# Altium PCB 20K Control Board V1.1.PcbDoc (part 8 of 24)
Units mm, origin at the board's own origin, x right, y up, seen from the top; angles counter-clockwise.
Board outline 132 x 260 mm, 4 copper layers (Top Layer, GND, VCC, Bottom Layer); 1384 components, 779 nets, 4515 pads, 1774 vias.
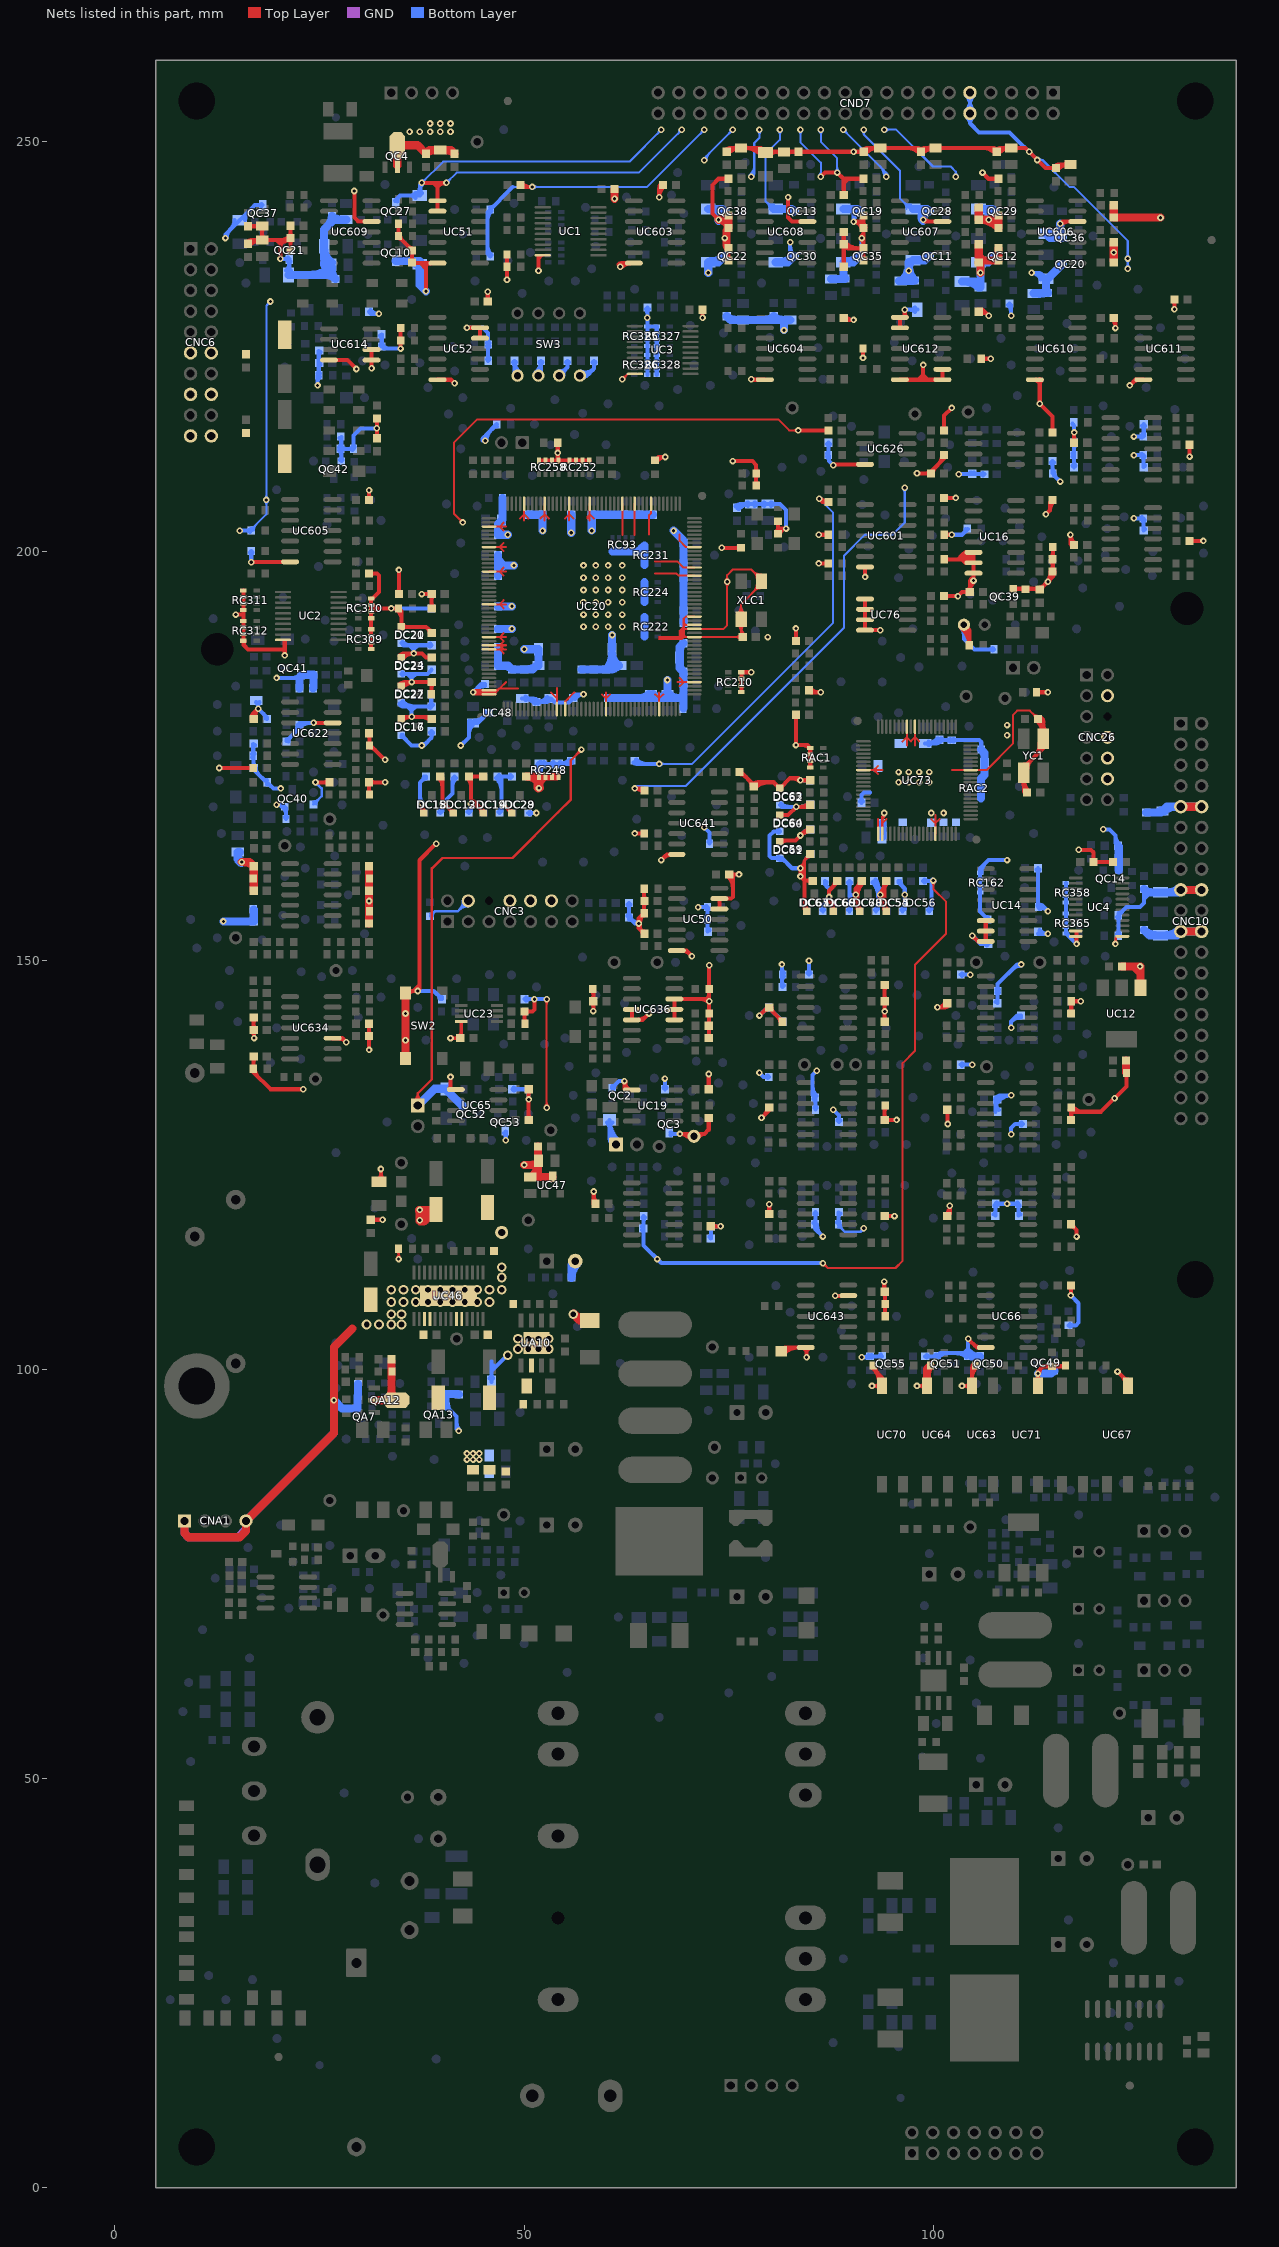
[diagram p10: the nets of this part, all layers, seen from the top]

## Via types
v1: diameter 0.8, hole 0.4, Top Layer to Bottom Layer, tented both sides, 1354 vias
v2: diameter 1.2, hole 0.7, Top Layer to Bottom Layer, 261 vias
v3: diameter 0.8, hole 0.4, Top Layer to Bottom Layer, 58 vias
v4: diameter 1.2, hole 0.7, Top Layer to Bottom Layer, tented top, 58 vias
v5: diameter 0.8, hole 0.4, Top Layer to Bottom Layer, tented top, 22 vias
v6: diameter 1.2, hole 0.7, Top Layer to Bottom Layer, tented both sides, 13 vias
v7: diameter 1.2, hole 0.7, Top Layer to Bottom Layer, tented bottom, 8 vias

## Nets (pads, with @x,y where several pads share a name; then routed paths per layer and width w, separated by ;. In a path a pad name is that pad's centre, name@x,y a point inside that pad or via, vN(x,y) a via of type N, cw(c..) or ccw(c..) an arc to the next point about the centre after c; other vN are vias at no path point) (continued)
GND: (continued)
  Top Layer w0.5: v1(12.75,173.5) RC444.1@16.9,173.5 ; v1(14.75,192.25) 15.7,192.25 ; 15.7,188.688 cw(c16.212,188.688) 15.85,189.05 ccw(c16.334,188.734) 15.925,188.325 ; RC311.5@15.7,195.2 RC311.6@15.7,194.4 RC311.7@15.7,193.6 RC311.8@15.7,192.8 15.7,192.25 ; CC225.2@16.073,237.727 cw(c16.733,237.067) CC225.2@16.733,238 ; CC225.2@16.25,237.55 16.7,238 CC334.2@18,238 21.45,238 ccw(c21.45,236.234) 20.201,237.483 ; CC247.2@16.25,239.7 17.95,239.7 CC334.2@17.95,238.05 ; CC225.2@16.427,237.373 cw(c17.94,235.86) CC334.2@17.94,238 ; CC247.2@16.427,239.523 cw(c16.854,239.096) 16.854,239.7 cw(c16.854,240.304) CC247.2@16.427,239.877 ; v1@16.69,198.69 UC605.7@21.4,198.69 ; CC278.2@16.709,179.432 cw(c17.412,179.63) 16.896,180.146 ; v1@16.756,198.544 cw(c17.109,198.191) 17.109,198.69 ; RC188.1@16.759,136.941 ccw(c16.296,137.404) 16.95,137.404 ; RC444.1@16.759,173.359 ccw(c16.417,173.017) 16.417,173.5 ccw(c16.417,173.983) RC444.1@16.759,173.641 ; CC98.1@16.773,138.073 cw(c16.346,137.646) 16.95,137.646 cw(c17.554,137.646) CC98.1@17.127,138.073 ; CC18.2@16.773,141.323 cw(c16.226,140.776) v1@17,140.776 ; CC18.2@16.773,141.677 ccw(c16.346,142.104) 16.95,142.104 ccw(c17.554,142.104) CC18.2@17.127,141.677 ; CC447.2@16.773,142.823 cw(c16.346,142.396) 16.95,142.396 cw(c17.554,142.396) CC447.2@17.127,142.823 ; CC278.2@16.773,179.677 ccw(c16.346,180.104) 16.95,180.104 ccw(c17.554,180.104) CC278.2@17.127,179.677 ; CC98.1@16.95,138.25 16.95,136.3 19,134.25 v1(23,134.25) ; CC18.2@16.95,141.5 CC447.2@16.95,143 ; CC278.2@16.95,179.5 16.95,180.2 v1(17.5,180.75) ccw(c18.355,179.895) CC278.2@17.191,179.568 ; 16.955,239.7 ccw(c16.955,240.595) CC342.2@17.588,239.962 ; v1(17,140.5) CC18.2@17,141.7 ; RC188.1@17.1,136.7 ccw(c18.428,136.7) 17.489,135.761 ; 17.196,239.7 cw(c17.196,239.146) CC342.2@17.588,239.538 ; CC334.2@17.588,237.788 ccw(c17.076,237.276) 17.076,238 ccw(c17.076,238.724) CC334.2@17.588,238.212 ; CC334.2@17.788,238.212 ccw(c17.396,238.604) 17.95,238.604 ; CC342.2@17.788,239.538 cw(c17.396,239.146) 17.95,239.146 ; 17.95,238.845 ccw(c18.845,238.845) CC334.2@18.212,238.212 ; 17.95,238.905 cw(c18.845,238.905) CC342.2@18.212,239.538 ; CC334.2@18.412,237.788 cw(c18.924,237.276) 18.924,238 cw(c18.924,238.724) CC334.2@18.412,238.212 ; 19.718,238 20.218,237.5 ; v1(20.218,235.718) 20.218,237.5 ; 20.218,237.968 20.218,237.5 ; 20.243,238 ccw(c20.243,239.457) 21.273,238.427 ccw(c20.846,238.854) 21.45,238.854 ccw(c22.054,238.854) CC350.2@21.627,238.427 ; 20.478,237.759 cw(c21.15,237.087) CC350.2@21.388,238.008 ; 20.718,238 20.218,237.5 ; v1(20.75,187.25) 20.75,189 ; 20.75,187.75 20.5,188 ; 20.75,188.25 20.5,188 ; CC355.2@21.273,236.927 ccw(c20.846,237.354) 21.45,237.354 ccw(c22.054,237.354) CC355.2@21.627,236.927 ; CC350.2@21.273,238.073 cw(c20.846,237.646) 21.45,237.646 cw(c22.054,237.646) CC350.2@21.627,238.073 ; CC317.2@21.273,239.573 cw(c20.846,239.146) 21.45,239.146 cw(c22.054,239.146) CC317.2@21.627,239.573 ; CC355.2@21.45,236.75 CC350.2@21.45,238.25 CC317.2@21.45,239.75 ; v1(24.27,179.02) UC622.12@26.6,179.02 ; v1(24.5,171.75) CC346.1@26.2,171.75 ; CC346.1@26.023,171.573 ccw(c25.596,171.146) 25.596,171.75 ccw(c25.596,172.354) CC346.1@26.023,171.927 ; UC614.4@26.15,223.345 28.405,223.345 v1(29.5,222.25) ; UC634.10@26.6,140.48 27.77,140.48 v1(28.25,140) ; UC634.10@27.4,140.43 cw(c27.4,139.416) v1@28.117,140.133 ; UC634.10@27.414,140.432 cw(c27.57,139.91) 27.955,140.295 ; v1(29.25,244) 29.25,240.75 29.73,240.27 UC609.12@31.35,240.27 ; CC90.1@30.873,140.573 cw(c30.446,140.146) 31.05,140.146 cw(c31.654,140.146) CC90.1@31.227,140.573 ; CC90.1@30.873,140.927 ccw(c30.446,141.354) 31.05,141.354 ccw(c31.654,141.354) CC90.1@31.227,140.927 ; CC449.2@30.873,142.073 cw(c30.446,141.646) 31.05,141.646 cw(c31.654,141.646) CC449.2@31.227,142.073 ; CC283.1@30.873,171.573 cw(c30.446,171.146) 31.05,171.146 cw(c31.654,171.146) 31.227,171.573 cw(c31.654,171.146) 31.654,171.75 cw(c31.654,172.354) CC283.1@31.227,171.927 ; CC282.1@30.873,177.573 cw(c30.326,177.026) 31.1,177.026 ; CC180.2@30.873,206.427 ccw(c30.446,206.854) 31.05,206.854 ccw(c31.654,206.854) CC180.2@31.227,206.427 ; RC485.1@30.959,176.441 ccw(c30.617,176.783) 31.1,176.783 ccw(c31.583,176.783) RC485.1@31.241,176.441 ; v1(31.05,139.05) CC449.2@31.05,142 ; RC489.1@31.05,170.3 CC283.1@31.05,171.75 ; 31.05,170.904 ccw(c31.704,170.904) RC489.1@31.241,170.441 ; CC181.2@31.05,197.25 32,197.25 32.25,197 32.25,195 RC310.8@31.45,194.2 ; CC180.2@31.05,206.25 v1(31.05,207.45) ; CC283.1@31.1,171.75 v1(33,171.75) ; RC485.1@31.1,176 cw(c31.1,175.034) 31.783,175.717 ; CC282.1@31.1,177.7 RC485.1@31.1,176.25 31.25,176.25 v1(33,174.5) ; CC181.2@31.227,197.073 cw(c31.654,196.646) 31.654,197.25 cw(c31.654,197.854) CC181.2@31.227,197.427 ; CC291.2@31.25,118.3 v1(32.7,118.3) ; 31.3,188.3 RC310.8@31.3,194.2 ; RC310.6@31.3,192.6 31.7,193 v1(33.75,193) RC225.1@34.65,193 35,192.65 DC20.1@35,191 ; v1(31.35,222.35) UC614.6@31.35,224.615 ; CC291.2@31.427,118.123 cw(c31.854,117.696) 31.854,118.3 cw(c31.854,118.904) CC291.2@31.427,118.477 ; 31.556,192.856 ccw(c31.812,192.6) 31.45,192.6 cw(c32.416,191.634) 32.416,193 cw(c32.416,194.366) 31.45,193.4 cw(c31.13,192.928) 31.7,192.928 ; CC287.2@31.823,213.977 ccw(c31.396,214.404) 32,214.404 ccw(c32.604,214.404) CC287.2@32.177,213.977 ; CC288.2@31.823,216.023 cw(c31.396,215.596) 32,215.596 cw(c32.604,215.596) CC288.2@32.177,216.023 ; CC287.2@32,213.8 CC288.2@32,216.2 ; RC501.1@32.217,123.233 ccw(c31.534,123.916) 32.5,123.916 ccw(c33.466,123.916) RC501.1@32.783,123.233 ; RC501.1@32.5,122.95 v1(32.5,124.5) ; RC225.1@34.509,192.809 cw(c33.322,191.622) 35,191.622 ; RC225.1@34.509,192.859 ccw(c34.167,192.517) 34.167,193 ccw(c34.167,193.483) RC225.1@34.509,193.141 ; RC526.1@34.509,238.691 ccw(c34.167,239.033) 34.65,239.033 ccw(c35.133,239.033) RC526.1@34.791,238.691 ; RC27.2@34.509,239.809 cw(c34.167,239.467) 34.65,239.467 cw(c35.133,239.467) RC27.2@34.791,239.809 ; CC140.1@34.523,194.927 ccw(c34.096,195.354) 34.7,195.354 ccw(c35.304,195.354) CC140.1@34.877,194.927 ; RC526.1@34.65,238.5 34.65,238.436 36.3,236.786 CC219.2@36.3,236.75 CC243.2@36.3,235.25 ; RC27.2@34.65,239.75 34.65,238.25 cw(c34.65,237.8) RC526.1@34.968,238.118 ; CC140.1@34.7,194.75 v1(34.7,197.7) ; RC530.1@34.759,225.559 cw(c34.417,225.217) 34.9,225.217 cw(c35.383,225.217) RC530.1@35.041,225.559 ; RC530.1@34.759,225.941 ccw(c34.417,226.283) 34.9,226.283 ccw(c35.383,226.283) RC530.1@35.041,225.941 ; RC529.1@34.759,227.059 cw(c34.417,226.717) 34.9,226.717 cw(c35.383,226.717) RC529.1@35.041,227.059 ; DC24.1@34.774,187.186 cw(c35.439,186.638) 35.439,187.5 ; DC27.1@34.793,183.707 cw(c35.5,183) 35.5,184 ; RC526.1@34.85,238.45 ccw(c35.366,238.45) RC526.1@35.001,238.085 ; DC20.1@34.853,190.897 ccw(c34.5,191.25) 35,191.25 ccw(c35.5,191.25) 35.147,190.897 ccw(c35.5,191.25) 35.5,190.75 ccw(c35.5,190.25) DC20.1@35.147,190.603 ; v1(34.9,224.75) RC530.1@34.9,225.75 RC529.1@34.9,227.25 ; DC17.1@35,179.5 35.25,179.75 CC143.1@38.45,179.75 ; DC27.1@35,183.5 35.5,184 CC154.1@38.7,184 38.7,182.55 RC234.1@38.65,182.5 ; DC27.1@35,183.707 ccw(c35,184.207) 35.354,183.854 ccw(c35.707,183.5) DC27.1@35.207,183.5 ; DC24.1@35,187 35.5,187.5 v1(36.5,187.5) ; DC24.1@35,187.207 ccw(c35,187.707) 35.354,187.354 ccw(c35.707,187) DC24.1@35.207,187 ; DC20.1@35,190.75 38,190.75 CC152.1@38.7,190.05 ; DC17.1@35.147,179.353 cw(c36.104,178.396) v1@36.104,179.75 ; DC27.1@35.147,183.353 cw(c36.707,181.793) 36.707,184 ; DC24.1@35.16,186.868 cw(c36.5,185.763) v1(36.5,187.5) ; SW2.2@35.75,146.25 36.5,146.25 ; SW2.2@35.783,146.433 ccw(c36.224,146.874) 36.224,146.25 ; SW2.2@35.82,145.91 cw(c36.5,145.4) 36.5,146.25 ; CC219.2@35.847,237.239 cw(c35.359,236.75) CC219.2@36.05,236.75 ; CC219.2@35.935,237.151 ccw(c36.3,237.516) CC219.2@36.3,237 ; CC243.2@36.123,235.427 ccw(c35.696,235.854) 36.3,235.854 ccw(c36.904,235.854) 36.477,235.427 ccw(c37.048,235.998) 37.048,235.19 ; CC219.2@36.123,236.573 cw(c35.696,236.146) 36.3,236.146 cw(c36.904,236.146) CC219.2@36.477,236.573 ; CC243.2@36.36,235.19 UC51.7@39.4,235.19 UC51.7@38.5,235.19 ; v1@36.894,146.356 ccw(c36.095,147.155) 37.225,147.155 ; v1@37.132,146.322 cw(c37.614,146.586) 37.225,146.975 36.5,146.25 ; 37.31,235.19 38,234.5 ; 37.493,179.75 cw(c37.493,178.293) CC143.1@38.523,179.323 ; v1@37.5,169.104 ccw(c38.854,169.104) DC15.1@37.897,168.147 ; v1(37.5,169.155) 37.5,168.25 DC15.1@37.75,168 ; v1(37.5,194.75) CC137.1@38.7,194.75 CC139.1@38.7,193 ; v1(37.5,245) v1(40.5,245) ; 37.75,235.19 38,234.94 ; v1(38,231.75) 38,234.5 ; 38.075,235.015 cw(c38.436,234.654) UC51.7@38.585,235.142 ; 38.238,190.512 cw(c37.726,190) CC152.1@38.45,190 ; 38.25,235.19 38,234.94 ; CC152.1@38.359,190.391 ccw(c38.7,190.733) CC152.1@38.7,190.25 ; RC234.1@38.509,182.691 ccw(c38.046,183.154) 38.7,183.154 ; CC154.1@38.523,184.177 cw(c38.096,184.604) 38.096,184 cw(c38.096,183.396) 38.523,183.823 cw(c38.096,183.396) 38.7,183.396 cw(c39.304,183.396) CC154.1@38.877,183.823 ; CC155.1@38.523,186.823 ccw(c38.096,186.396) 38.096,187 ccw(c38.096,187.604) CC155.1@38.523,187.177 ; CC139.1@38.523,193.177 ccw(c38.096,193.604) 38.7,193.604 ccw(c39.304,193.604) CC139.1@38.877,193.177 ; CC137.1@38.523,194.927 cw(c38.096,195.354) 38.096,194.75 cw(c38.096,194.146) 38.523,194.573 cw(c38.096,194.146) 38.7,194.146 cw(c39.304,194.146) CC137.1@38.877,194.573 ; CC155.1@38.7,187 38,187 37.5,187.5 v1(36.5,187.5) ; 38.9,245 39.4,244.5 ; v1(39.25,164.25) 37.225,162.225 37.225,146.475 v1(37,146.25) 36.5,146.25 ; UC52.7@39.4,220.94 41.06,220.94 v1(41.5,220.5) ; UC51.2@39.4,241.54 39.4,244.5 ; 39.4,244.9 39.4,244.5 ; CC148.1@39.573,172.273 cw(c38.543,171.243) 40,171.243 ; 39.601,244.7 cw(c40.14,244.161) v1@40.441,244.862 ; CC148.1@39.75,172.45 40,172.2 v1(40,169.155) 40.19,169.155 DC12.1@41.345,168 ; 39.9,245 39.4,244.5 ; v1@40,169.005 cw(c40,168.184) 40.58,168.765 ; UC65.1@40.815,134.24 ccw(c40.367,134.688) 41,134.688 ; UC65.1@41,134.25 v1@41,135.645 ; DC12.1@41.138,168 ccw(c40.638,168) 40.991,168.354 ccw(c41.345,168.707) DC12.1@41.345,168.207 ; v1(43,227.29) UC52.13@44.6,227.29 UC52.12@44.6,226.02 ; CC133.1@43.073,172.273 cw(c42.043,171.243) 43.5,171.243 ; CC133.1@43.427,172.273 cw(c43.854,171.846) 43.854,172.45 cw(c43.854,173.054) CC133.1@43.427,172.627 ; v1@43.5,169.005 cw(c43.5,167.206) 44.772,168.478 ; v1@43.5,169.505 cw(c43.5,168.914) 43.918,169.332 ; v1@43.559,169.017 cw(c43.858,168.323) 44.392,168.858 ; 44.47,168.78 cw(c43.689,168) DC19.1@44.793,168 ; CC134.1@44.823,172.273 ccw(c44.396,171.846) 44.396,172.45 ccw(c44.396,173.054) CC134.1@44.823,172.627 ; DC19.1@45,168 45,168.25 44.095,169.155 v1(43.5,169.155) 43.5,172.2 CC133.1@43.25,172.45 CC134.1@45,172.45 ; CC42.2@45.373,230.677 ccw(c44.946,231.104) 45.55,231.104 ccw(c46.154,231.104) CC42.2@45.727,230.677 ; CC42.2@45.55,230.5 v1(45.55,231.7) ; v1@47.25,169.005 cw(c47.25,168.414) 47.668,168.832 ; v1(47.25,169.155) 47.345,169.155 DC28.1@48.5,168 ; RC516.1@47.759,234.559 cw(c47.417,234.217) 47.9,234.217 cw(c48.383,234.217) RC516.1@48.041,234.559 ; RC516.1@47.759,234.941 ccw(c47.417,235.283) 47.9,235.283 ccw(c48.383,235.283) RC516.1@48.041,234.941 ; RC517.1@47.759,236.059 cw(c47.417,235.717) 47.9,235.717 cw(c48.383,235.717) RC517.1@48.041,236.059 ; v1(47.9,233.15) RC517.1@47.9,236.25 ; DC28.1@48.293,168 ccw(c47.793,168) 48.146,168.354 ccw(c48.5,168.707) DC28.1@48.5,168.207 ; CC30.1@49.55,244.75 49.8,244.5 v1(51,244.5) ; CC30.1@49.727,244.927 ccw(c50.757,245.957) v1@50.757,244.5 ; CC164.2@49.873,143.573 cw(c49.446,143.146) 50.05,143.146 cw(c50.654,143.146) 50.227,143.573 cw(c50.654,143.146) 50.654,143.75 cw(c50.654,144.354) CC164.2@50.227,143.927 ; RC288.1@50.05,142.3 CC164.2@50.05,143.75 51,143.75 51.25,144 v1(51.25,145.25) ; 50.05,142.904 ccw(c50.704,142.904) RC288.1@50.241,142.441 ; CC397.2@50.373,130.677 ccw(c49.946,131.104) 50.55,131.104 ccw(c51.154,131.104) CC397.2@50.727,130.677 ; CC393.2@50.373,134.073 cw(c49.946,133.646) 50.55,133.646 cw(c51.154,133.646) CC393.2@50.727,134.073 ; CC397.2@50.55,130.5 CC393.2@50.55,134.25 ; v1(51.75,234.25) 51.75,236 ; RC258.8@51.8,211.05 RC258.7@52.6,211.05 RC258.6@53.4,211.05 RC258.5@54.2,211.05 RC252.8@55.55,211.05 RC252.7@56.35,211.05 RC252.6@57.15,211.05 RC252.5@57.95,211.05 ; RC262.2@53.959,213.059 cw(c53.617,212.717) 54.1,212.717 cw(c54.583,212.717) RC262.2@54.241,213.059 ; RC258.5@54.1,211.15 v1(54.1,212) RC262.2@54.1,213.25 ; RC258.5@54.1,211.441 ccw(c54.441,211.441) RC258.5@54.2,211.2 ; RC706.2@58.259,146.309 cw(c57.796,145.846) 58.45,145.846 ; CC216.1@58.273,144.823 cw(c57.846,144.396) 58.45,144.396 cw(c59.054,144.396) CC216.1@58.627,144.823 ; CC216.1@58.273,145.177 ccw(c57.846,145.604) 58.45,145.604 ccw(c59.054,145.604) CC216.1@58.627,145.177 ; v1(58.45,143.8) CC216.1@58.45,145 RC706.2@58.45,146.45 ; CC9.2@58.5,120.2 v1(58.5,121.75) ; 58.5,121.336 ccw(c59.786,121.336) CC9.2@58.877,120.427 ; v1@61.503,234.997 cw(c61.967,234.533) 61.967,235.19 ; v1(61.75,234.75) 62.19,235.19 UC603.7@63.4,235.19 ; v1@61.815,234.815 cw(c62.6,234.029) UC603.7@62.6,235.14 ; v1@61.856,234.644 cw(c63.174,233.326) UC603.7@63.174,235.19 ; v1@61.985,234.985 cw(c62.42,234.551) UC603.7@62.586,235.142 ; 62.25,134.517 ccw(c62.712,134.517) UC19.1@62.385,134.19 ; 62.25,134.75 62.845,134.155 UC19.1@63.15,134.155 ; v1(62.25,135.25) 62.25,134.25 UC19.1@62.345,134.155 ; v1@62.394,135.207 ccw(c63.164,134.974) UC19.1@62.595,134.405 ; UC19.1@62.746,134.254 cw(c62.62,134.127) UC19.1@62.798,134.109 ; UC636.4@63.15,144 UC636.5@63.15,142.73 64.48,142.73 v1(65.25,143.5) ; v1(63.5,165.5) RC684.1@64.65,165.5 ; UC636.5@63.95,142.78 ccw(c63.95,144.18) 64.94,143.19 ; v1@64.147,154.468 ccw(c65.152,154.252) CC45.1@64.425,153.525 ; v1@64.15,154.503 cw(c65.858,154.542) RC534.1@64.65,155.75 ; RC534.1@64.223,155.323 cw(c64.65,154.896) RC534.1@64.65,155.5 ; CC45.1@64.45,153.25 ccw(c63.846,153.25) 64.273,153.677 ccw(c64.7,154.104) CC45.1@64.7,153.5 ; CC166.2@64.45,171 v1(63.5,171) cw(c63.5,169.56) CC166.2@64.522,170.574 ; RC534.1@64.509,155.941 ccw(c64.167,156.283) 64.65,156.283 ccw(c65.133,156.283) RC534.1@64.791,155.941 ; RC533.1@64.509,158.559 cw(c64.167,158.217) 64.65,158.217 cw(c65.133,158.217) RC533.1@64.791,158.559 ; RC684.1@64.509,165.359 ccw(c64.167,165.017) 64.167,165.5 ccw(c64.167,165.983) RC684.1@64.509,165.641 ; 64.65,156.526 cw(c65.424,156.526) CC47.1@64.877,157.073 ; 64.65,157.974 ccw(c65.424,157.974) CC47.1@64.877,157.427 ; RC533.1@64.65,158.75 RC534.1@64.65,155.75 ; CC45.1@64.7,153.25 64,153.95 64,155.1 RC534.1@64.65,155.75 ; RC95.2@66,211.1 66.4,211.5 v1(67.25,211.5) ccw(c67.25,210.2) RC95.2@66.21,210.98 ; v1@66.5,243.184 cw(c68.352,243.184) CC182.2@67.117,244.564 ; v1(66.5,243.25) 66.5,244.3 CC182.2@66.95,244.75 ; CC182.2@66.5,244.303 cw(c67.35,244.303) CC182.2@66.783,244.936 ; v1(66.75,162.25) 67.44,162.94 UC641.7@68.65,162.94 ; v1@67.029,162.529 cw(c67.9,161.659) UC641.7@67.9,162.89 ; 67.21,162.71 cw(c67.706,162.214) UC641.7@67.887,162.892 ; UC636.10@68.35,142.73 UC636.12@68.35,145.27 72.25,145.27 ; UC50.7@68.65,151.19 69.81,151.19 v1(70.5,150.5) ; UC50.7@69.45,151.14 cw(c69.45,150.15) 70.15,150.85 ; UC50.7@69.464,151.142 cw(c69.617,150.637) 69.99,151.01 ; TP30.1@70.318,128.159 ccw(c69.032,127.142) v1(69.032,128.782) 72.032,128.782 ; TP30.1@71.252,128.276 cw(c72.032,127.928) 72.032,128.782 ; 71.586,145.27 cw(c71.586,143.986) v1@72.494,144.894 ; CC186.2@71.623,229.323 cw(c71.196,228.896) 71.8,228.896 cw(c72.404,228.896) CC186.2@71.977,229.323 ; v1(71.8,228.5) CC186.2@71.8,229.5 ; CC105.2@72.373,130.573 cw(c71.946,130.146) 72.55,130.146 cw(c73.154,130.146) CC105.2@72.727,130.573 ; CC103.2@72.373,134.427 ccw(c71.946,134.854) 72.55,134.854 ccw(c73.154,134.854) CC103.2@72.727,134.427 ; CC73.1@72.373,140.677 ccw(c71.826,141.224) 72.6,141.224 ; CC80.2@72.373,141.823 cw(c71.826,141.276) 72.6,141.276 ; CC80.2@72.373,142.177 ccw(c71.826,142.724) 72.6,142.724 ; RC157.2@72.459,143.309 cw(c72.117,142.967) 72.6,142.967 cw(c73.083,142.967) RC157.2@72.741,143.309 ; RC157.2@72.459,143.691 ccw(c72.117,144.033) 72.6,144.033 ccw(c73.083,144.033) RC157.2@72.741,143.691 ; RC161.2@72.459,146.309 cw(c72.117,145.967) 72.6,145.967 cw(c73.083,145.967) RC161.2@72.741,146.309 ; RC161.2@72.459,146.691 ccw(c72.117,147.033) 72.6,147.033 ccw(c73.083,147.033) RC161.2@72.741,146.691 ; CC105.2@72.55,130.75 72.55,129.3 72.032,128.782 ; CC103.2@72.55,134.25 v1(72.55,136.111) ; v1@72.58,145.27 72.25,145.27 ; CC73.1@72.6,140.55 RC161.2@72.6,146.5 v1(72.6,149.4) ; 72.6,145.62 72.25,145.27 ; CC8.2@72.8,117.5 v1(74,117.5) ; CC8.2@72.977,117.323 cw(c73.404,116.896) 73.404,117.5 cw(c73.404,118.104) CC8.2@72.977,117.677 ; v1(73.75,240.5) 73,241.25 73,244.75 73.75,245.5 CC307.1@74.95,245.5 ; UC50.12@73.85,156.27 UC50.13@73.85,157.54 75.29,157.54 75.5,157.75 75.5,160.05 CC46.2@75.05,160.5 v1(76.25,160.5) ; v1(74.15,200.4) RC148.1@76.5,200.4 ; v1@74.394,238.144 cw(c73.051,236.801) CC232.2@74.95,236.801 ; v1@74.394,238.356 ccw(c73.051,239.699) CC220.1@74.95,239.699 ; CC232.2@74.5,237.483 ccw(c75.433,237.483) 74.773,236.823 cw(c74.346,236.396) 74.95,236.396 cw(c75.554,236.396) CC232.2@75.127,236.823 ; 74.5,237.81 cw(c76.64,237.81) 75.127,239.323 ccw(c75.554,238.896) 74.95,238.896 ccw(c74.346,238.896) CC220.1@74.773,239.323 ; 74.5,238.69 ccw(c76.64,238.69) 75.127,237.177 cw(c75.554,237.604) 74.95,237.604 cw(c74.346,237.604) CC232.2@74.773,237.177 ; CC220.1@74.5,239.017 cw(c75.433,239.017) 74.773,239.677 ccw(c74.346,240.104) 74.95,240.104 ccw(c75.554,240.104) CC220.1@75.127,239.677 ; CC246.2@74.573,248.977 cw(c75.233,248.317) CC246.2@75.233,249.25 ; v1@74.747,238.003 ccw(c74.259,238.491) 74.95,238.491 ; v1@74.747,238.497 cw(c74.259,238.009) 74.95,238.009 ; CC246.2@74.75,248.8 75.2,249.25 78.95,249.25 79.4,248.8 CC206.2@83.5,248.8 CC223.2@91.5,248.8 91.95,249.25 CC332.2@93.5,249.25 98.05,249.25 CC233.2@98.5,248.8 98.95,249.25 107.3,249.25 CC234.2@107.75,248.8 108.2,249.25 111.25,249.25 113.7,246.8 CC224.2@115,246.8 115.45,247.25 CC333.2@116.75,247.25 ; CC252.1@74.773,235.677 ccw(c74.346,236.104) 74.95,236.104 ccw(c75.554,236.104) CC252.1@75.127,235.677 ; CC230.1@74.773,240.823 cw(c74.346,240.396) 74.95,240.396 cw(c75.554,240.396) CC230.1@75.127,240.823 ; CC307.1@74.773,245.323 ccw(c74.346,244.896) 74.346,245.5 ccw(c74.346,246.104) CC307.1@74.773,245.677 ; CC46.2@74.873,160.323 cw(c73.36,158.81) 75.5,158.81 ; CC246.2@74.927,248.623 cw(c76.44,247.11) CC343.2@76.44,249.25 ; CC252.1@74.95,235.5 CC230.1@74.95,241 ; CC232.2@74.95,237 74.5,237.45 74.5,239 CC220.1@74.95,239.45 ; CC46.2@75.227,160.323 cw(c75.654,159.896) 75.654,160.5 cw(c75.654,161.104) 75.227,160.677 cw(c74.567,160.017) CC46.2@75.5,160.017 ; v1(75.5,211) 77.886,211 78.35,210.536 RC237.2@78.35,209.5 RC236.2@78.35,208 ; CC343.2@76.088,249.038 ccw(c75.576,248.526) 75.576,249.25 ccw(c75.576,249.974) CC343.2@76.088,249.462 ; CC420.2@76.3,172.75 cw(c76.3,171.664) 77.068,172.432 ; CC420.2@76.3,173 76.5,173 78.05,171.45 CC426.2@78.05,171.25 78.555,171.755 80.495,171.755 DC63.1@81.25,171 82.5,172.25 83.5,172.25 v1(83.75,172) CC439.2@84.95,172 CC439.2@84.7,172.25 ; RC148.1@76.309,200.259 ccw(c75.967,199.917) 75.967,200.4 ccw(c75.967,200.883) RC148.1@76.309,200.541 ; RC210.5@76.55,182.8 RC210.8@76.55,185.2 v1(77.75,185.2) ; CC343.2@76.912,249.038 cw(c77.424,248.526) 77.424,249.25 cw(c77.424,249.974) CC343.2@76.912,249.462 ; CC343.2@76.957,249.25 cw(c76.957,246.407) CC208.2@78.967,248.417 ; 77.482,172.018 cw(c76.714,171.25) CC426.2@77.8,171.25 ; v1(77.75,221) 77.81,220.94 UC604.7@79.4,220.94 ; v1@77.856,221.106 ccw(c78.257,221.507) 78.257,220.94 ; CC426.2@77.873,171.427 cw(c78.666,170.634) 78.666,171.755 ; CC426.2@78.05,171.5 ccw(c78.05,172.104) 78.477,171.677 ccw(c78.904,171.25) CC426.2@78.3,171.25 ; 78.164,249.25 cw(c78.164,247.614) CC208.2@79.321,248.771 ; RC236.2@78.209,208.191 ccw(c77.867,208.533) 78.35,208.533 ccw(c78.833,208.533) RC236.2@78.491,208.191 ; RC237.2@78.209,209.309 cw(c77.867,208.967) 78.35,208.967 cw(c78.833,208.967) RC237.2@78.491,209.309 ; RC237.2@78.209,209.691 ccw(c77.867,210.033) 78.35,210.033 ccw(c78.833,210.033) RC237.2@78.491,209.691 ; CC426.2@78.227,171.073 cw(c79.873,169.427) 79.873,171.755 ; v1(78.75,143.25) 79.75,144.25 CC178.2@79.95,144.25 79.95,144.136 CC71.2@81.55,142.536 ; v1(79,130.75) CC78.1@79.95,131.7 ; 79.182,143.682 cw(c79.95,142.914) CC178.2@79.95,144 ; 79.311,131.061 ccw(c78.372,132) CC78.1@79.7,132 ; CC87.2@79.773,119.177 ccw(c79.346,119.604) 79.95,119.604 ccw(c80.554,119.604) CC87.2@80.127,119.177 ; CC87.2@79.95,119 v1(79.95,120.2) ; CC208.2@80.033,248.417 cw(c80.957,247.493) 80.957,248.8 ; CC208.2@80.033,248.983 ccw(c80.474,249.424) 80.474,248.8 ; CC178.2@80.2,144.25 ccw(c81.078,144.25) 80.457,143.629 ; 80.705,248.8 cw(c80.705,247.905) CC331.2@81.338,248.538 ; RC154.1@80.752,202.133 cw(c81.441,202.056) 81.441,202.75 ; RC154.1@80.859,202.241 ccw(c80.517,202.583) 81,202.583 ccw(c81.483,202.583) RC154.1@81.141,202.241 ; RC153.1@80.859,203.509 cw(c80.517,203.167) 81,203.167 cw(c81.483,203.167) RC153.1@81.141,203.509 ; 80.946,248.8 ccw(c80.946,249.354) CC331.2@81.338,248.962 ; RC154.1@81,202.1 RC153.1@81,203.65 ; 81,202.75 v1(82,202.75) ccw(c82,201.994) RC154.1@81.249,202.078 ; DC63.1@81.043,171 ccw(c80.543,171) 80.896,171.354 ccw(c81.25,171.707) 81.25,171.207 ccw(c81.25,171.707) 81.604,171.354 ccw(c81.957,171) DC63.1@81.457,171 ; CC71.2@81.097,142.989 cw(c80.609,142.5) CC71.2@81.3,142.5 ; CC71.2@81.185,142.901 ccw(c81.55,143.266) CC71.2@81.55,142.75 ; DC59.1@81.25,164.5 81.4,164.65 83.15,164.65 v1(83.75,165.25) 84.25,165.75 ; DC64.1@81.25,167.75 82.25,167.75 v1(83.25,168.75) 84.7,168.75 CC416.1@84.95,169 ; DC59.1@81.397,164.353 cw(c82.112,163.638) 82.112,164.65 ; DC64.1@81.397,167.603 cw(c81.75,167.25) 81.75,167.75 cw(c81.75,168.25) DC64.1@81.397,167.897 ; LEDA1.2@81.404,102.321 cw(c82.296,101.429) 82.296,102.69 ; LEDA1.2@81.425,102.25 81.865,102.69 UC643.7@84.4,102.69 ; LEDA1.2@81.758,101.967 cw(c83.503,100.222) UC643.7@83.503,102.69 ; CC331.2@82.162,248.538 cw(c82.795,247.905) 82.795,248.8 ; CC331.2@82.162,248.962 ccw(c82.554,249.354) 82.554,248.8 ; v1(82.25,243.25) 82.25,240.75 82.73,240.27 UC608.12@84.6,240.27 ; 82.784,172.25 cw(c82.784,171.034) v1@83.644,171.894 ; CC434.1@83.023,179.823 cw(c82.596,179.396) 83.2,179.396 cw(c83.804,179.396) CC434.1@83.377,179.823 ; CC431.2@83.023,189.177 ccw(c82.596,189.604) 83.2,189.604 ccw(c83.804,189.604) CC431.2@83.377,189.177 ; CC434.1@83.2,180 v1(83.2,176.3) 84.6,176.3 RAC1.5@84.95,175.95 RAC1.8@84.95,173.55 ; CC431.2@83.2,189 v1(83.2,190.55) ; CC206.2@83.323,248.623 ccw(c82.896,248.196) 82.896,248.8 ccw(c82.896,249.404) CC206.2@83.323,248.977 ; v1(83.5,214.75) CC58.1@87.2,214.75 ; v1@83.644,161.144 cw(c82.784,160.284) v1@84,160.284 ; v1@83.666,160.375 ccw(c83.247,161) v1@84,161 ; CC206.2@83.677,248.623 cw(c84.104,248.196) 84.104,248.8 cw(c84.104,249.404) CC206.2@83.677,248.977 ; 83.743,168.75 ccw(c83.743,170.207) CC416.1@84.773,169.177 ; v1@83.755,165.255 cw(c84.95,164.06) CC418.1@84.95,165.75 ; 83.955,176.3 cw(c83.955,175.105) 84.8,175.95 ccw(c84.438,175.95) 84.694,176.206 ; v1@84.025,165.525 cw(c84.659,164.891) CC418.1@84.887,165.758 ; UC643.7@84.06,102.69 84.5,102.25 ; 84.25,157.104 ccw(c85.604,157.104) DC67.1@84.647,156.147 ; v1(84.5,101.5) 84.5,102.25 ; UC643.7@84.5,102.69 84.5,102.25 ; DC67.1@84.5,156 84.25,156.25 84.25,159.75 ; 84.526,159.75 cw(c84.526,158.976) CC421.1@85.073,159.523 ; CC418.1@84.7,165.75 84.25,165.75 ; CC418.1@84.714,166.081 cw(c84.25,166.24) 84.25,165.75 ; CC439.2@84.773,171.823 ccw(c84.346,171.396) 84.346,172 ccw(c84.346,172.604) CC439.2@84.773,172.177 ; CC135.1@84.8,183 85.05,182.75 v1(86.25,182.75) ; CC135.1@84.977,183.177 ccw(c86.007,184.207) v1@86.007,182.75 ; UC643.7@85,102.75 84.5,102.25 ; CC421.1@85.25,159.7 85.2,159.75 84.25,159.75 ; v1(86,198.5) RC253.1@87.15,198.5 ; v1(86,202) RC239.1@87.15,202 ; v1(86.05,206.4) 86.45,206 CC146.2@87.2,206 cw(c87.2,207.327) v1@86.167,206.494 ; v1(86.25,245.75) 86.75,246.25 v1(88.25,246.25) 89.05,245.45 ; RC253.1@87.009,198.359 ccw(c86.667,198.017) 86.667,198.5 ccw(c86.667,198.983) RC253.1@87.009,198.641 ; RC239.1@87.009,201.859 ccw(c86.667,201.517) 86.667,202 ccw(c86.667,202.483) RC239.1@87.009,202.141 ; CC146.2@87.023,205.823 ccw(c86.596,205.396) 86.596,206 ccw(c86.596,206.604) CC146.2@87.023,206.177 ; CC58.1@87.023,214.573 ccw(c86.596,214.146) 86.596,214.75 ccw(c86.596,215.354) CC58.1@87.023,214.927 ; v1@87.385,157.684 ccw(c87.923,157.423) 87.5,157 ; DC66.1@87.603,156.147 ccw(c87.25,156.5) 87.75,156.5 ccw(c88.25,156.5) DC66.1@87.897,156.147 ; 87.682,158.932 ccw(c86.914,159.7) CC423.1@88,159.7 ; DC66.1@87.75,156 87.75,156.75 87.25,157.25 87.25,158.5 88.25,159.5 CC423.1@88.25,159.7 ; v1@87.845,210.595 UC626.4@91.65,210.595 ; v1@87.856,210.394 cw(c88.341,209.909) 88.341,210.595 ; v1(88,109) UC643.13@89.65,109 ; CC215.2@88.873,234.927 ccw(c88.446,235.354) 89.05,235.354 ccw(c89.654,235.354) CC215.2@89.227,234.927 ; CC242.2@88.873,237.677 ccw(c88.446,238.104) 89.05,238.104 ccw(c89.654,238.104) 89.227,237.677 ccw(c90.861,239.311) 90.861,237 ; CC239.1@88.873,238.823 cw(c88.446,238.396) 89.05,238.396 cw(c89.654,238.396) CC239.1@89.227,238.823 ; CC212.1@88.873,243.677 ccw(c88.446,244.104) 89.05,244.104 ccw(c89.654,244.104) CC212.1@89.227,243.677 ; CC187.2@89.05,228.5 89.3,228.25 v1(90.25,228.25) cw(c90.25,229.69) CC187.2@89.228,228.676 ; CC215.2@89.05,234.75 CC239.1@89.05,239 ; CC242.2@89.05,237.5 89.55,237 CC352.2@91.45,237 ; CC212.1@89.05,243.5 89.05,245 ; CC242.2@89.227,237.323 ccw(c89.654,236.896) 89.05,236.896 ccw(c88.446,236.896) 88.873,237.323 ccw(c89.654,238.104) 89.654,237 ; 89.55,245.5 89.05,245 ; v1@90.394,157.894 cw(c89.534,157.034) 90.75,157.034 ; v1@90.394,158.106 ccw(c89.534,158.966) 90.75,158.966 ; 90.682,158.932 ccw(c89.914,159.7) CC430.1@91,159.7 ; 90.75,157 90.5,157.25 90.5,158.75 90.75,159 ; 90.75,157.104 ccw(c92.104,157.104) DC68.1@91.147,156.147 ; v1@90.75,157.889 cw(c93.061,157.889) CC430.1@91.427,159.523 ; 90.75,158.84 cw(c91.368,158.84) CC430.1@91.284,159.452 ; 90.85,240.25 cw(c90.85,239.39) CC214.1@91.696,239.545 ; DC68.1@91,156 90.75,156.25 90.75,159 ; v1@91.144,238.144 cw(c90.405,237.405) CC352.2@91.45,237.405 ; v1@91.144,238.356 ccw(c90.405,239.095) CC214.1@91.45,239.095 ; CC214.1@91.204,239.455 ccw(c90.25,239.28) v1(90.25,240.25) 91.45,240.25 ; CC430.1@91.25,159.7 91.25,159.5 90.75,159 ; RC40.2@91.259,224.559 cw(c90.917,224.217) 91.4,224.217 cw(c91.883,224.217) RC40.2@91.541,224.559 ; CC240.2@91.273,235.677 ccw(c90.846,236.104) 91.45,236.104 ccw(c92.054,236.104) CC240.2@91.627,235.677 ; CC214.1@91.273,239.323 cw(c90.846,238.896) 91.45,238.896 cw(c92.054,238.896) CC214.1@91.627,239.323 ; CC250.1@91.273,240.823 cw(c90.846,240.396) 91.45,240.396 cw(c92.054,240.396) CC250.1@91.627,240.823 ; CC228.1@91.273,245.323 ccw(c90.846,244.896) 90.846,245.5 ccw(c90.846,246.104) CC228.1@91.273,245.677 ; CC223.2@91.323,248.623 ccw(c90.896,248.196) 90.896,248.8 ccw(c90.896,249.404) 91.323,248.977 cw(c91.983,248.317) CC223.2@91.983,249.25 ; v1(91.4,223.6) RC40.2@91.4,224.75 ; CC240.2@91.45,235.5 CC352.2@91.45,237 ; CC250.1@91.45,241 91.45,240.25 ; CC228.1@91.45,245.5 89.05,245.5 89.05,245 ; CC352.2@91.627,236.823 ccw(c92.054,236.396) 91.45,236.396 ccw(c90.846,236.396) 91.273,236.823 ccw(c90.846,236.396) 90.846,237 ccw(c90.846,237.604) 91.273,237.177 ccw(c90.846,237.604) 91.45,237.604 ccw(c92.054,237.604) CC352.2@91.627,237.177 ; UC76.1@91.65,194.155 UC76.2@91.65,192.885 UC76.3@91.65,191.615 UC76.4@91.65,190.345 v1(93.5,190.345) ; v1(91.65,196.85) UC601.7@91.65,198.065 ; CC223.2@91.677,248.623 cw(c93.19,247.11) CC332.2@93.19,249.25 ; v1(92.5,98) UC70.2@93.73,98 93.5,98.23 93.5,99.25 ; RC640.1@92.65,100.5 92.65,100.1 93.5,99.25 ; RC640.1@92.694,100.056 cw(c91.038,98.4) UC70.2@93.38,98.4 ; RC640.1@92.85,100.45 ccw(c94.178,100.45) 93.239,99.511 ; CC332.2@93.088,249.038 ccw(c92.576,248.526) 92.576,249.25 ccw(c92.576,249.974) CC332.2@93.088,249.462 ; 93.19,99.56 cw(c92.511,98.881) UC70.2@93.404,98.528 ; v1@93.394,157.894 cw(c91.931,156.431) DC54.1@94,156.431 ; v1@93.4,158.112 ccw(c92.208,159.45) CC394.1@94,159.45 ; UC70.2@93.483,97.753 ccw(c92.885,97.155) 92.885,98 ccw(c92.885,98.845) UC70.2@93.483,98.247 ; 93.548,99.202 cw(c92.745,98.4) UC70.2@93.88,98.4 ; v1@93.635,157.934 ccw(c94.173,157.673) 93.75,157.25 ; v1@93.65,158 cw(c94.616,158) 93.933,158.683 ; v1@93.733,157.739 ccw(c93.202,158.335) 94,158.335 ; v1@93.747,158.247 cw(c93.138,157.638) 94,157.638 ; UC70.2@93.858,98.726 cw(c94.063,99.25) 93.5,99.25 ; CC405.2@93.873,109.323 cw(c93.326,108.776) 94.1,108.776 ; CC72.1@93.873,130.677 ccw(c93.446,131.104) 94.05,131.104 ccw(c94.654,131.104) 94.227,130.677 ccw(c94.654,131.104) 94.654,130.5 ccw(c94.654,129.896) CC72.1@94.227,130.323 ; CC86.1@93.873,142.677 ccw(c93.446,143.104) 94.05,143.104 ccw(c94.654,143.104) CC86.1@94.227,142.677 ; CC177.2@93.873,144.823 cw(c93.446,144.396) 94.05,144.396 cw(c94.654,144.396) CC177.2@94.227,144.823 ; CC177.2@93.873,145.177 ccw(c93.446,145.604) 94.05,145.604 ccw(c94.654,145.604) CC177.2@94.227,145.177 ; CC92.1@93.873,146.823 cw(c93.446,146.396) 94.05,146.396 cw(c94.654,146.396) CC92.1@94.227,146.823 ; CC332.2@93.912,249.038 cw(c94.424,248.526) 94.424,249.25 cw(c94.424,249.974) CC332.2@93.912,249.462 ; RC662.1@93.959,106.691 ccw(c93.617,107.033) 94.1,107.033 ccw(c94.583,107.033) RC662.1@94.241,106.691 ; RC671.1@93.959,107.809 cw(c93.617,107.467) 94.1,107.467 cw(c94.583,107.467) RC671.1@94.241,107.809 ; RC671.1@93.959,108.191 ccw(c93.617,108.533) 94.1,108.533 ccw(c94.583,108.533) RC671.1@94.241,108.191 ; CC405.2@94,109.55 v1(94,110.75) ; 94,110.224 ccw(c94.774,110.224) CC405.2@94.227,109.677 ; 94,157 93.5,157.5 v1(93.5,158) 93.5,158.25 94,158.75 ; 94,157.104 ccw(c95.354,157.104) DC54.1@94.397,156.147 ; 94,158.493 cw(c95.457,158.493) CC394.1@94.427,159.523 ; CC88.2@94.05,118.75 v1(95.25,118.75) ; 94.05,131.596 cw(c94.704,131.596) RC108.1@94.241,132.059 ; RC108.1@94.05,132.2 CC72.1@94.05,130.5 v1(95.5,130.5) ; CC86.1@94.05,142.5 CC92.1@94.05,147 ; RC662.1@94.1,106.75 CC405.2@94.1,109.7 ; CC88.2@94.227,118.573 cw(c94.654,118.146) 94.654,118.75 cw(c94.654,119.354) CC88.2@94.227,118.927 ; DC54.1@94.25,156 94,156.25 CC394.1@94,159.45 ; CC394.1@94.25,159.7 CC394.1@94,159.45 ; UC612.7@95.9,220.94 98.75,220.94 ; UC612.2@95.9,227.29 UC612.1@95.9,228.56 96.44,228.56 96.5,228.62 v1(96.5,229.5) ; v1@96.5,229.164 ccw(c97.304,229.164) UC612.1@96.735,228.595 ; 96.81,249.25 cw(c96.81,247.11) CC233.2@98.323,248.623 ; v1(98,98) UC64.2@99.23,98 ; v1(98,209.5) CC76.2@99.7,209.5 99.7,209.7 101.3,211.3 CC70.2@101.3,211.75 ; CC233.2@98.017,249.25 cw(c98.017,248.317) CC233.2@98.677,248.977 ; 98.19,220.94 98.75,221.5 ; CC233.2@98.323,248.977 cw(c98.983,248.317) CC233.2@98.983,249.25 ; CC233.2@98.677,248.623 cw(c100.19,247.11) CC336.2@100.19,249.25 ; v1(98.75,222.75) 98.75,221.5 ; v1(98.75,240.5) 98.98,240.27 UC607.12@101.1,240.27 ; v1@98.856,240.606 ccw(c99.667,241.417) 99.667,240.27 ; UC64.2@98.983,97.753 ccw(c98.385,97.155) 98.385,98 ccw(c98.385,98.845) UC64.2@98.983,98.247 ; 99.309,220.94 98.75,221.5 ; CC76.2@99.523,209.323 ccw(c99.096,208.896) 99.096,209.5 ccw(c99.096,210.104) CC76.2@99.523,209.677 ; CC336.2@99.838,249.038 ccw(c99.326,248.526) 99.326,249.25 ccw(c99.326,249.974) CC336.2@99.838,249.462 ; CC76.2@99.95,209.5 cw(c101.036,209.5) 100.268,210.268 ; v1(100.5,144.25) 101.2,144.25 CC21.2@101.7,144.75 CC21.2@101.45,144.5 ; v1(100.5,144.25) ccw(c100.5,145.335) CC21.2@101.475,144.86 ; 100.555,210.555 ccw(c99.36,211.75) CC70.2@101.05,211.75 ; CC336.2@100.662,249.038 cw(c101.174,248.526) 101.174,249.25 cw(c101.174,249.974) CC336.2@100.662,249.462 ; UC612.9@101.1,222.21 UC612.8@101.1,220.94 98.75,220.94 ; CC55.1@101.123,214.927 ccw(c100.696,215.354) 101.3,215.354 ccw(c101.904,215.354) CC55.1@101.477,214.927 ; CC21.2@101.3,144.25 ccw(c101.3,144.945) CC21.2@101.925,144.64 ; CC442.2@101.3,194.5 v1(103,194.5) 103.5,195 CC271.2@104.45,195 104.45,195.95 v1(104.9,196.4) UC16.8@104.9,197.305 UC16.7@104.9,198.575 ; CC141.1@101.3,206.5 v1(102.75,206.5) ; CC55.1@101.3,214.75 101.3,216.55 v1(102.25,217.5) ; RC244.1@101.35,199 103,199 ; RC250.1@101.35,202 v1(102.25,202) ; CC442.2@101.477,194.323 cw(c101.904,193.896) 101.904,194.5 cw(c101.904,195.104) CC442.2@101.477,194.677 ; CC141.1@101.477,206.323 cw(c101.904,205.896) 101.904,206.5 cw(c101.904,207.104) CC141.1@101.477,206.677 ; RC244.1@101.491,198.859 cw(c101.833,198.517) 101.833,199 cw(c101.833,199.483) RC244.1@101.491,199.141 ; RC250.1@101.491,201.859 cw(c101.833,201.517) 101.833,202 cw(c101.833,202.483) RC250.1@101.491,202.141 ; CC16.2@101.523,131.573 cw(c100.976,131.026) 101.75,131.026 ; CC63.2@101.531,118.934 ccw(c100.555,120) v1(102,120) 102,119.05 CC63.2@101.7,118.75 ; v1(101.75,130) CC16.2@101.75,131.75 ; NTCC1.2@103.4,190.625 cw(c101.453,188.412) RC465.2@104.4,188.412 ; v1(103.5,98) UC63.2@104.73,98 104.73,100.08 RC601.1@105.15,100.5 ; 103.579,199.579 cw(c104.1,199.058) UC16.6@104.1,199.795 ; 103.716,198.784 ccw(c104.1,199.169) UC16.7@104.1,198.625 ; UC16.7@104.051,198.564 ccw(c103.5,198.433) 103.5,199 ; UC16.6@104.054,199.865 cw(c103.5,200.103) 103.5,199.5 ; 104.132,199 cw(c104.132,198.582) UC16.7@104.538,198.678 ; v1(104.25,103.75) 105.31,102.69 UC66.7@106.4,102.69 ; RC465.2@104.259,188.691 ccw(c103.917,189.033) 104.4,189.033 ccw(c104.883,189.033) RC465.2@104.541,188.691 ; 104.259,199.5 ccw(c104.259,199.776) UC16.6@104.513,199.667 ; CC271.2@104.273,194.823 ccw(c103.846,194.396) 103.846,195 ccw(c103.846,195.604) 104.273,195.177 ccw(c103.846,195.604) 104.45,195.604 ccw(c105.054,195.604) CC271.2@104.627,195.177 ; RC465.2@104.4,188.5 104.4,190.33 NTCC1.2@103.73,191 cw(c102.426,189.518) 104.4,189.518 ; CC271.2@104.45,194.951 cw(c106.349,194.951) v1@105.006,196.294 ; 104.45,195.764 cw(c104.937,195.764) v1@104.909,196.25 ; 104.45,196.159 cw(c105.141,196.159) v1@104.653,196.647 ; UC63.2@104.483,97.753 ccw(c103.885,97.155) 103.885,98 ccw(c103.885,98.845) UC63.2@104.483,98.247 ; UC63.2@104.483,98.647 ccw(c103.885,99.245) 104.73,99.245 ccw(c105.575,99.245) UC63.2@104.977,98.647 ; UC63.2@104.73,98.953 cw(c106.647,98.953) RC601.1@105.291,100.309 ; RC601.1@104.73,100.16 cw(c105.44,100.16) RC601.1@104.938,100.662 ; v1(104.75,153) 105.445,152.305 UC14.8@106.4,152.305 UC14.7@106.4,153.575 UC14.6@106.4,154.845 ; 104.9,199.5 103.5,199.5 ; 105.02,102.98 ccw(c105.6,103.561) UC66.7@105.6,102.74 ; 105.25,152.5 ccw(c105.6,152.85) UC14.8@105.6,152.355 ; CC193.2@105.429,229.469 cw(c105.714,228.954) 106.13,229.37 ; CC193.2@105.54,229.5 cw(c105.582,228.493) 106.295,229.205 ; CC193.2@105.55,229.25 106.25,229.25 v1(106.75,228.75) ; CC193.2@105.671,229.031 cw(c106.048,228.348) v1@106.6,228.9 ; CC193.2@105.727,229.073 cw(c106.154,228.646) 106.154,229.25 cw(c106.154,229.854) CC193.2@105.727,229.427 ; RC36.2@105.8,223.5 v1(107,223.5) ; RC36.2@105.991,223.359 cw(c106.333,223.017) 106.333,223.5 cw(c106.333,223.983) RC36.2@105.991,223.641 ; v1(106,246.25) 106.75,245.5 CC238.1@107.95,245.5 ; 106.06,249.25 cw(c106.06,247.11) CC234.2@107.573,248.623 ; CC234.2@107.267,249.25 cw(c107.267,248.317) CC234.2@107.927,248.977 ; CC234.2@107.573,248.977 cw(c108.233,248.317) CC234.2@108.233,249.25 ; CC238.1@107.773,245.323 ccw(c107.346,244.896) 107.346,245.5 ccw(c107.346,246.104) CC238.1@107.773,245.677 ; CC234.2@107.927,248.623 cw(c109.44,247.11) CC337.2@109.44,249.25 ; CC337.2@109.088,249.038 ccw(c108.576,248.526) 108.576,249.25 ccw(c108.576,249.974) CC337.2@109.088,249.462 ; QC39.2@109.75,195.405 CC273.2@112.895,195.405 ; QC39.2@109.897,195.258 cw(c110.25,194.905) 110.25,195.405 cw(c110.25,195.905) QC39.2@109.897,195.552 ; CC337.2@109.912,249.038 cw(c110.424,248.526) 110.424,249.25 cw(c110.424,249.974) CC337.2@109.912,249.462 ; 110.584,195.405 cw(c110.584,194.734) RC469.2@111.059,195.209 ; YC1.2@110.732,172.032 cw(c109.964,171.264) 111.05,171.264 cw(c112.136,171.264) YC1.2@111.368,172.032 ; CC403.1@111.05,170.862 ccw(c111.812,170.862) CC403.1@111.273,170.323 ; YC1.2@111.05,172.069 ccw(c113.019,172.069) CC403.1@111.627,170.677 ; YC1.2@111.05,173.9 ccw(c111.05,174.745) YC1.2@111.647,174.147 ; RC469.2@111.441,195.209 cw(c111.916,194.734) 111.916,195.405 ; CC403.1@111.45,170.5 111.05,170.9 YC1.2@111.05,172.9 111.05,173.55 113.45,175.95 YC1.4@113.45,177.1 113.45,178.85 CC404.1@112.8,179.5 ; YC1.2@111.5,173.45 cw(c112.828,173.45) 111.889,174.389 ; 112.143,195.405 cw(c112.143,194.443) CC273.2@112.823,195.123 ; 112.258,174.758 ccw(c110.465,176.55) YC1.4@113,176.55 ; UC71.3@112.523,98.647 ccw(c111.925,99.245) 112.77,99.245 ccw(c113.615,99.245) UC71.3@113.017,98.647 ; UC610.7@112.56,220.94 113,220.5 ; RC639.2@112.6,182.75 v1(114,182.75) ; CC404.1@112.623,179.323 cw(c110.627,177.327) YC1.4@113.45,177.327 ; RC639.2@112.741,182.609 cw(c113.083,182.267) 113.083,182.75 cw(c113.083,183.233) RC639.2@112.741,182.891 ; UC71.3@112.77,98 112.77,99.77 113.4,100.4 RC609.1@114.5,100.4 RC634.2@116.05,100.4 ; CC404.1@112.795,179.25 cw(c112.781,178.581) 113.45,178.581 ; CC404.1@112.8,179.25 cw(c112.8,178.646) 113.227,179.073 cw(c113.654,179.5) CC404.1@113.05,179.5 ; CC404.1@112.805,179.75 cw(c112.791,179.091) 113.45,179.091 ; v1@112.92,99.5 cw(c113.934,99.5) 113.217,100.217 ; CC404.1@112.977,179.677 cw(c111.834,178.534) 113.45,178.534 ; CC273.2@113,195.3 114.55,196.85 CC100.1@114.55,197.5 ; CC273.2@113,195.55 ccw(c113,196.154) 113.427,195.727 ccw(c113.854,195.3) CC273.2@113.25,195.3 ; 113,220.336 cw(c113.804,220.336) UC610.7@113.235,220.905 ; UC610.7@113,221 113,220.5 ; 113.111,175.611 ccw(c112.172,176.55) YC1.4@113.5,176.55 ; YC1.4@113.132,177.968 ccw(c112.364,178.736) 113.45,178.736 ccw(c114.536,178.736) YC1.4@113.768,177.968 ; 113.659,195.959 cw(c114,195.617) v1@114,196.1 ; 113.664,195.964 ccw(c112.127,197.5) CC100.1@114.3,197.5 ; v1(113.75,204.5) 114.25,205 114.25,205.95 CC95.1@114.55,206.25 ; v1@114.15,196.25 cw(c114.633,196.25) 114.291,196.591 ; 114.25,204.965 cw(c115.777,204.965) CC95.1@114.723,206.069 ; RC609.1@114.309,100.259 ccw(c113.967,99.917) 113.967,100.4 ccw(c113.967,100.883) RC609.1@114.309,100.541 ; CC100.1@114.373,197.323 cw(c113.946,196.896) 114.55,196.896 cw(c115.154,196.896) CC100.1@114.727,197.323 ; CC100.1@114.373,197.677 ccw(c113.826,198.224) 114.6,198.224 ; CC99.1@114.373,198.823 cw(c113.826,198.276) 114.6,198.276 ; CC99.1@114.373,199.177 ccw(c113.826,199.724) 114.6,199.724 ; CC77.2@114.373,214.677 ccw(c113.946,215.104) 114.55,215.104 ccw(c115.154,215.104) CC77.2@114.727,214.677 ; RC193.2@114.459,200.309 cw(c114.117,199.967) 114.6,199.967 cw(c115.083,199.967) RC193.2@114.741,200.309 ; 114.517,196.817 ccw(c113.834,197.5) CC100.1@114.8,197.5 ; CC77.2@114.55,214.5 114.55,216.45 v1(113,218) 113,220.5 ; CC100.1@114.6,197.55 RC193.2@114.6,200.5 ; RC609.1@114.691,100.259 cw(c115.033,99.917) 115.033,100.4 cw(c115.033,100.883) RC609.1@114.691,100.541 ; CC224.2@114.823,246.623 ccw(c114.396,246.196) 114.396,246.8 ccw(c114.396,247.404) 114.823,246.977 cw(c115.483,246.317) CC224.2@115.483,247.25 ; CC224.2@115.177,246.623 cw(c116.69,245.11) CC333.2@116.69,247.25 ; v1(115.5,240) 115.77,240.27 UC606.12@117.6,240.27 ; 115.546,100.4 ccw(c115.546,101.054) RC634.2@116.009,100.591 ; v1@115.606,239.894 cw(c116.514,238.986) UC606.12@116.514,240.27 ; CC333.2@116.338,247.038 ccw(c115.826,246.526) 115.826,247.25 ccw(c115.826,247.974) CC333.2@116.338,247.462 ; CC401.2@116.623,110.073 cw(c116.196,109.646) 116.8,109.646 cw(c117.404,109.646) CC401.2@116.977,110.073 ; CC15.2@116.623,130.677 ccw(c116.076,131.224) 116.85,131.224 ; CC20.2@116.623,143.677 ccw(c116.076,144.224) 116.85,144.224 ; RC38.1@116.638,131.738 ccw(c117.212,132.312) RC38.1@117.212,131.5 ; RC38.1@116.709,131.809 cw(c116.367,131.467) 116.85,131.467 cw(c117.333,131.467) RC38.1@116.991,131.809 ; RC41.1@116.709,144.809 cw(c116.367,144.467) 116.85,144.467 cw(c117.333,144.467) RC41.1@116.991,144.809 ; CC277.2@116.75,201.107 ccw(c117.419,201.107) CC277.2@117.069,200.537 ; v1(116.8,109.05) CC401.2@116.8,110.25 ; CC62.2@116.8,117.5 cw(c116.8,116.896) 117.227,117.323 cw(c117.654,117.75) CC62.2@117.05,117.75 ; CC62.2@116.8,117.75 117.5,117.05 v1(117.5,116.25) ; CC15.2@116.85,130.3 RC38.1@116.85,132 117.35,131.5 120.5,131.5 123.6,134.6 RC158.1@123.6,136.25 ; RC38.1@116.85,131.75 cw(c116.85,131.146) RC38.1@117.277,131.573 ; CC20.2@116.85,143.55 RC41.1@116.85,145 v1(118,145) ; RC38.1@116.991,132.091 ccw(c118.419,133.519) 118.419,131.5 ; RC41.1@116.991,144.859 cw(c117.333,144.517) 117.333,145 cw(c117.333,145.483) RC41.1@116.991,145.141 ; CC275.2@117.023,213.427 ccw(c116.596,213.854) 117.2,213.854 ccw(c117.804,213.854) CC275.2@117.377,213.427 ; CC277.2@117.2,200.75 116.75,201.2 v1(116.75,202) ccw(c117.966,202) CC277.2@117.331,200.963 ; CC275.2@117.2,213.25 v1@117.2,214.3 ; v1(117.5,152) 117.5,153.4 ; v1(117.75,163.5) 119.25,163.5 119.55,163.2 CC221.2@119.55,162 CC222.1@121.95,162 ; CC221.2@119.373,162.177 ccw(c118.946,162.604) 119.55,162.604 ccw(c120.154,162.604) 119.727,162.177 ccw(c120.154,162.604) 120.154,162 ccw(c120.154,161.396) CC221.2@119.727,161.823 ; CC222.1@121.773,161.823 ccw(c121.346,161.396) 121.346,162 ccw(c121.346,162.604) CC222.1@121.773,162.177 ; CC184.2@121.873,228.323 cw(c120.964,227.414) v1@122.25,227.414 ; CC184.2@122.05,228.5 122.25,228.3 v1(122.25,227.25) ; v1(122.5,99.75) 123.77,98.48 UC67.3@123.77,98 ; 123.116,99.134 cw(c122.382,98.4) UC67.3@123.42,98.4 ; UC67.3@123.309,98.941 ccw(c123.77,99.402) UC67.3@123.77,98.75 ; RC158.1@123.459,136.059 cw(c123.117,135.717) 123.6,135.717 cw(c124.083,135.717) RC158.1@123.741,136.059 ; v1(124,220.25) 124.69,220.94 UC611.7@125.65,220.94 ; 124.491,220.741 cw(c124.85,220.383) UC611.7@124.85,220.89 ; CC183.2@129.273,230.573 cw(c128.846,230.146) 129.45,230.146 cw(c130.054,230.146) CC183.2@129.627,230.573 ; v1(129.45,229.55) CC183.2@129.45,230.75 ; CC276.2@131.123,212.823 cw(c130.696,212.396) 131.3,212.396 cw(c131.904,212.396) CC276.2@131.477,212.823 ; CC280.2@131.3,201.25 v1(133,201.25) ; v1(131.3,211.55) CC276.2@131.3,213 ; CC280.2@131.477,201.073 cw(c131.904,200.646) 131.904,201.25 cw(c131.904,201.854) CC280.2@131.477,201.427 ; 15.7,192.25 RC312.5@15.7,191.45 RC312.6@15.7,190.65 RC312.7@15.7,189.85 RC312.8@15.7,189.05 15.7,188.55 16.25,188 20.5,188 ; 38,234.5 38,234.94 ; v1@84,160 v1@84,161 ; v1@84,160 84.25,159.75 ; v1@84,160 v1(83.75,160.25) v1(83.75,161.25) v1@84,161 ; UC643.7@84.365,102.655 cw(c84.038,102.328) 84.5,102.328 ; UC643.7@84.365,102.655 cw(c84.038,102.328) 84.5,102.328 ; UC643.7@84.365,102.655 cw(c84.038,102.328) 84.5,102.328 ; CC214.1@91.273,239.677 ccw(c90.846,240.104) 91.45,240.104 ; CC214.1@91.273,239.677 ccw(c90.846,240.104) 91.45,240.104 ; CC214.1@91.273,239.677 ccw(c90.846,240.104) 91.45,240.104 ; CC352.2@91.45,237 91.45,240.25 ; 91.45,240.104 ccw(c92.054,240.104) CC214.1@91.627,239.677 ; 91.45,240.104 ccw(c92.054,240.104) CC214.1@91.627,239.677 ; 91.45,240.104 ccw(c92.054,240.104) CC214.1@91.627,239.677 ; 98.75,220.94 98.75,221.5 ; 103,199 103.5,199 ; 103,199 103.5,199.5 ; 103.5,199.5 103.845,199.845 UC16.6@104.9,199.845 104.9,199 ; 103.5,199 104.9,199 ; 103.5,199 103.925,198.575 UC16.7@104.9,198.575 ; UC16.7@104.9,198.575 104.9,199 ; 90.85,159.1 ccw(c90.437,159.513) 91.006,159.644 cw(c90.437,159.513) 90.85,159.1
  Top Layer w1: CNA1.1@8.5,81.5 8.5,80 9,79.5 15.25,79.5 16,80.25 CNA1.4@16,81.5 26.75,92.25 26.75,102.75 29,105 ; v1(15.5,162) 16.45,162 CC40.2@16.95,161.5 ; v1@15.743,162 cw(c15.743,160.293) CC40.2@16.95,161.5 ; CC19.1@16.95,158.5 CC40.2@16.95,161.5 ; CC7.1@31.05,154.5 CC1.1@31.05,161.5 ; QA12.2@31.9,96.25 QA12.2@34.4,96.25 QA12.2@32.25,96.25 ; QA12.2@33.432,95.932 ccw(c32.664,95.164) 32.664,96.25 ccw(c32.664,97.336) 33.432,96.568 ccw(c32.543,97.457) 33.8,97.457 ; QA12.2@33.8,96.6 CA115.1@33.8,101 ; 33.8,97.216 ccw(c34.716,97.216) QA12.2@34.068,96.568 ; QA12.2@33.85,96.8 QA12.2@33.85,96.85 ; QC4.2@34.182,248.632 cw(c33.414,247.864) 34.5,247.864 cw(c35.586,247.864) QC4.2@34.818,248.632 ; QC4.2@34.5,247.1 QC4.2@34.5,249.6 36.95,249.6 CC192.2@38,248.55 ; QC4.2@34.818,249.282 cw(c35.586,248.514) 35.586,249.6 cw(c35.586,250.686) QC4.2@34.818,249.918 ; SW2.1@35.5,138 SW2.2@35.5,146 ; v1@37.152,119.478 ccw(c37.75,119.612) 37.75,119 38.7,119 EC4.2@39.25,119.55 37.95,118.25 ; v1@37.179,119.429 ccw(c38.216,120.466) 38.216,119 ; v1@37.197,118.165 ccw(c37.52,118.68) 37.95,118.25 ; v1@37.25,118.15 ccw(c37.25,119.599) 38.274,118.574 ; 38.164,119 cw(c38.164,117.764) EC4.2@39.038,118.638 ; 38.405,119.5 ccw(c38.405,120.395) EC4.2@39.038,119.762 ; CC348.1@39.086,249 ccw(c39.086,247.464) CC192.2@38,248.55 ; EC4.2@39.2,119.5 v1(37.25,119.5) v1(37.25,118.25) 37.95,118.25 ; CC348.1@40.414,249 cw(c40.414,247.464) CC191.2@41.5,248.55 41.05,249 38.45,249 CC192.2@38,248.55 ; v1(50,125) CC356.1@51.25,125 ; CC295.2@50.782,123.532 UC47.3@53.465,123.532 ; 50.905,125 ccw(c50.905,126.145) CC356.1@51.715,125.335 ; CC295.2@50.915,123.535 ccw(c49.019,125.431) CC356.1@51.7,125.431 ; 51.1,172.45 51.8,171.75 ; 51.476,172.074 cw(c50.452,171.05) v1@51.9,171.05 ; 51.524,172.025 ccw(c50.462,170.963) CC168.1@50.25,172.45 ; 51.7,123.582 CC294.2@51.7,127.25 ; v1@51.7,171.05 cw(c53.148,171.05) 52.124,172.074 ; 51.7,171.849 ccw(c50.25,170.399) CC168.1@50.25,172.45 ; v1@51.715,170.997 cw(c52.229,171.32) 51.8,171.75 ; RC248.1@51.767,172.202 ccw(c51.883,173.067) 52.5,172.45 51.8,171.75 ; v1(51.8,171.05) 51.8,171.75 ; RC248.1@51.8,172.45 51.8,171.75 ; RC248.4@53.95,172.45 CC168.1@50.25,172.45 ; v4(56,106.75) 56.75,106 ; v4@56.072,106.819 ccw(c58,108.678) DA7.1@58,106 56.75,106 ; DA7.1@57.426,105.714 ccw(c56.75,105.058) 56.75,106 ; DA7.1@57.426,106.286 cw(c56.75,106.942) 56.75,106 ; v1(61.05,243.05) CC179.2@61.05,244.25 ; v1(73.75,240.5) 74.45,240.5 ; UC64.2@99.23,98 99.23,100.08 RC603.1@99.65,100.5 ; 99.23,99.557 cw(c100.543,99.557) RC603.1@99.615,100.485 ; CC213.2@105.55,237.5 105.55,236 106.05,235.5 CC241.2@107.95,235.5 CC217.1@107.95,237 ; CC237.1@105.55,242 CC210.1@105.55,240.5 ; v1(105.75,234) CC351.2@105.75,235.05 ; CC351.2@105.75,234.767 ccw(c105.067,234.767) CC351.2@105.55,235.25 cw(c106.154,234.646) 106.154,235.5 ; v1@106.743,240.5 ccw(c106.743,242.207) CC211.1@107.95,241 CC218.1@107.95,239.5 ccw(c105.55,237.12) CC210.1@105.55,240.5 ; 107.7,240.5 CC210.1@105.55,240.5 ; CC231.2@122.05,235.5 CC142.1@122.05,237.75 ; CC306.1@122.05,242.25 CC229.1@122.05,240.75 v1(127.75,240.75) ; CC82.2@123.05,149.25 124.5,149.25 ; RC158.1@123.55,136.3 CC79.2@123.55,137.75 ; 125.25,148.5 124.5,149.25 ; UC12.1@125.3,146.65 125.3,149.25 124.5,149.25 ; CNC10.21@130.23,153.53 CNC10.22@132.77,153.53 ; CNC10.17@130.23,158.61 CNC10.18@132.77,158.61 ; CNC10.9@130.23,168.77 CNC10.10@132.77,168.77 ; v1(73.75,240.5) cw(c73.75,239.28) CC220.1@74.95,239.5 CC230.1@74.95,241 cw(c73.75,242.19) v1(73.75,240.5)
  GND w1: CNA1.1@8.5,81.5 8.5,80 9,79.5 15,79.5 16,80.5 CNA1.4@16,81.5 26.75,92.25 v1(26.75,96.25)